# Altium PCB Full_Bridge_Converter.PcbDoc (part 3 of 3)
Units mm, origin at the board's own origin, x right, y up, seen from the top; angles counter-clockwise.
Board outline 225.68 x 119 mm, 4 copper layers (Top Layer, GND, PWD, Bottom Layer), stack 2.398 mm thick; 171 components, 54 nets, 388 pads, 114 vias.
Unrouted connection lines stored in the file: 10.
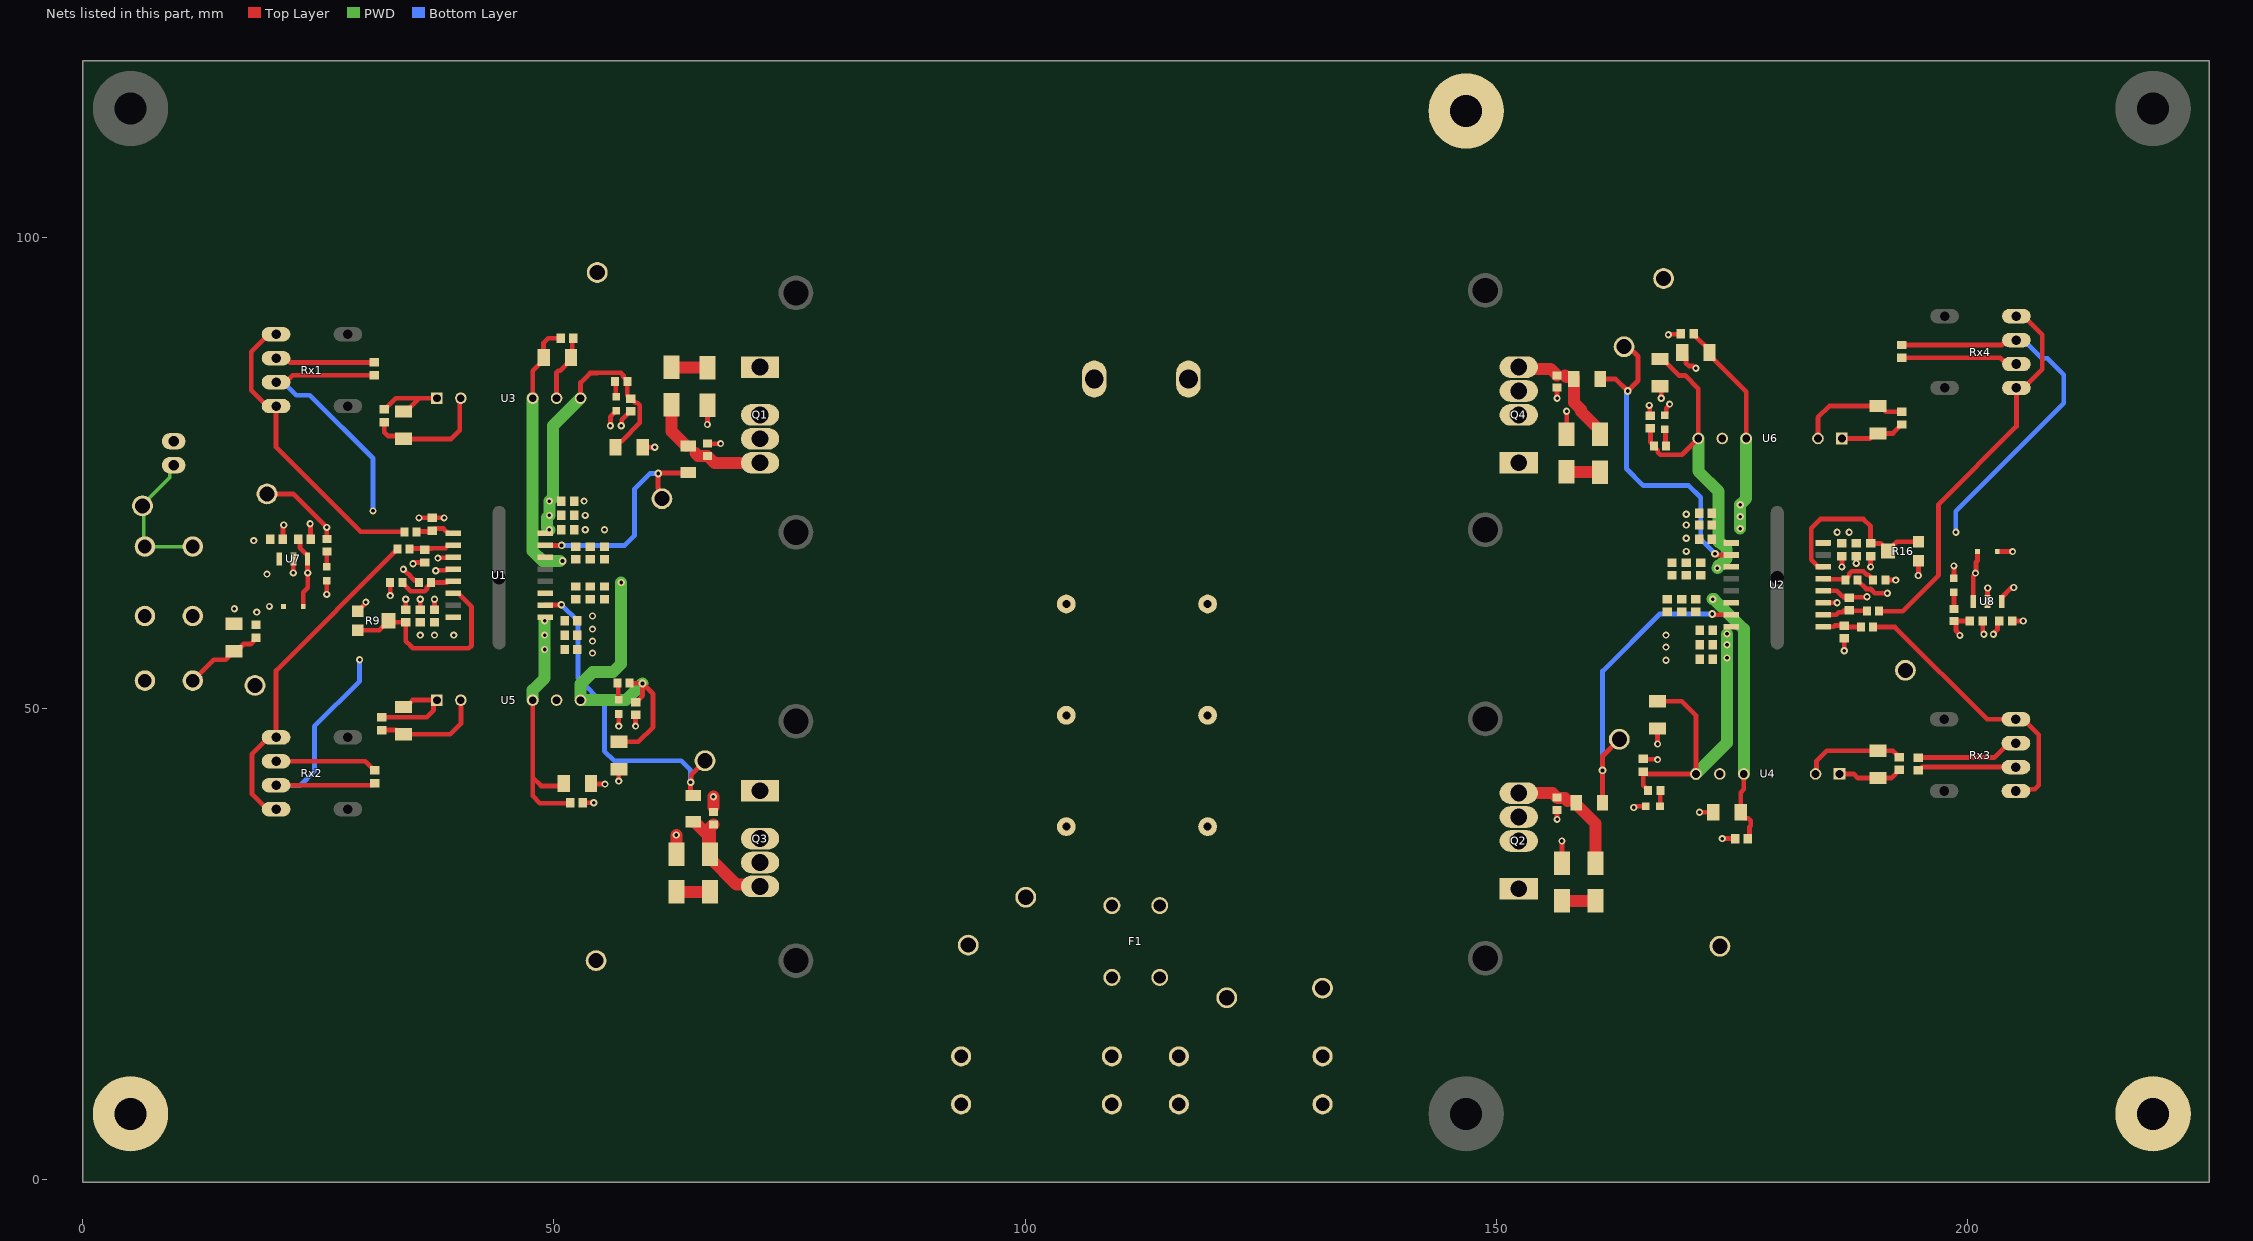
[diagram p4: the nets of this part, all layers, seen from the top]

## Part data (continued)
R19 R20 R21 R22 R23 R24: library part RC0603FR-0710KL, "RES SMD 10K OHM 1% 1/10W 0603", Device Package="0603 (1608 Metric)", Manufacturer=Yageo, Operating Temperature="-55°C ~ 155°C", Power (Watts)="0.1W, 1/10W", Supplier Device Package=0603, Supplier Part Number 1=311-10.0KHRCT-ND, Temperature Coefficient=±100ppm/°C, Tolerance=±1%, ComponentLink1Description=Datasheet, ComponentLink1URL=https://www.yageo.com/upload/media/product/productsearch/datasheet/rchip/PYu-RC_Group_51_RoHS_L_10.pdf, ComponentLink2Description="DigiKey Link", ComponentLink2URL=http://digikey.com/product-detail/en/yageo/RC0603FR-0710KL/311-10.0KHRCT-ND/729827, Composition="Thick Film", Features="Moisture Resistant", Height - Seated (Max)="0.022\" (0.55mm)", LastUpdated="2/9/2020 01:09:45", Lifecycle Status=Active, Minimum Order=1, Number of Terminations=2, Package / Case="0603 (1608 Metric)", Packaging=CutTape, Part Number=RC0603FR-0710KL, Part Status=Active, PartId=22599, Price=0.10, Resistance="10 kOhms", Series=RC, Size / Dimension="0.063\" L x 0.031\" W (1.60mm x 0.80mm)", Supplier 1=DigiKey
Rx1 Rx2 Rx3 Rx4: "RX Optical Fiber 5MBd 6-Pin", Manufacturer="Broadcom Avago", Max Operating Temperature=85°C, Max Output Current=25mA, Max Power Dissipation=40mW, Max Supply Voltage=7V, Min Operating Temperature=-40°C, Min Supply Voltage=-500mV, Operating Supply Current=10mA, Operating Supply Voltage=5V, Package Quantity=200, Supplier Part Number 1=516-2067-ND, Category="Fiber Optics", Data Rate=115Kbps, Fall Time=40ns, Height=18.8mm, Lead Free="Lead Free", Length=18.3mm, Manufacturer Part Number=HFBR-2531Z, Mount="Through Hole", Number of Pins=6, Output Current=25mA, Packaging=Rail/Tube, Pricing 1="1=12,98000, 10=9,79400, 100=8,22730, 500=7,55568, 1000=7,39200 (USD)", Radiation Hardening=No, REACH SVHC="No SVHC", Rise Time=80ns, RoHS=Yes, RoHS Compliant=Yes, Series=HFBR-2, Stock 1=6696, Supplier 1=Digi-Key, Wavelength=660nm, Weight=0.021164oz, Width=12.2mm
TP1 TP2 TP5 TP6 TP7 TP8 TP13 TP14 TP15 TP16: "Test Point, Multipurpose, Red, TH", Color=Red, Manufacturer=Keystone, Supplier Part Number 1=36-5010-ND, ComponentLink1Description="Datasheet URL", ComponentLink1URL=http://www.keyelco.com/userAssets/file/M60-2p60.pdf, CompType="Test Point Loop", ContactFinish=Silver, LatestRevisionDate=2016-02-11, MountType=TH, PackageReference="Red Multipurpose Testpoint", PartNumber=5010, Publisher="Texas Instruments", RoHS=Y, Supplier 1=Digi-Key, Supplier 2=Mouser, Supplier Part Number 2=534-5010, SymbolVersion=2008-04-04
TP3 TP4 TP9 TP10 TP11 TP12: "Test Point, Multipurpose, Black, TH", Color=Black, Manufacturer=Keystone, Supplier Part Number 1=36-5011-ND, ComponentLink1Description="Datasheet URL", ComponentLink1URL=http://www.keyelco.com/userAssets/file/M60-2p60.pdf, CompType="Test Point Loop", ContactFinish=Silver, LatestRevisionDate=2016-02-11, MountType=TH, PackageReference="Black Multipurpose Testpoint", PartNumber=5011, Publisher="Texas Instruments", RoHS=Y, Supplier 1=Digi-Key, Supplier 2=Mouser, Supplier Part Number 2=534-5011, SymbolVersion=2008-04-04
U1 U2: library part "UCC21530QDWKRQ1 (2)", "Isolated Dual-Channel Gate Driver 6A 2-Output High Side/Low Side/Half-Bridge 14-Pin SOIC T/R", Manufacturer="Texas Instruments", Supplier Part Number 1=595-UCC21530QDWKRQ1, Category="Integrated Circuits (ICs)", Manufacturer Part Number=UCC21530QDWKRQ1, Pricing 1="1=5,17000, 10=4,64000, 50=4,39000, 100=3,61000, 1000=2,59000, 10000=2,50000 (USD)", RoHS=Yes, RoHS Compliant=Yes, Stock 1=1426, Supplier 1=Mouser
U3 U4 U5 U6: "2W DC/DC-Converter 'ECONOLINE' SIP7 6.4kV unreg; V. In: 15; V. Out: +15/-03; mA. Out: +93/-185", Manufacturer=Recom, Max Output Voltage=15V, Supplier Part Number 1=945-3070-5-ND, Category="Voltage Regulators - Switching", ComponentLink1Description=https://www.recom-power.com/pdf/Econoline/RxxP2xxyy.pdf?src-supplier=Digi-Key, ComponentLink1URL=https://www.recom-power.com/pdf/Econoline/RxxP2xxyy.pdf?src-supplier=Digi-Key, Height=12.5mm, Length=19.5mm, Manufacturer Part Number=R15P21503D, Pricing 1="1=8,47000, 5=8,31800, 10=8,25500, 25=8,12800, 50=7,87400, 100=7,26000, 250=6,98500, 500=6,85800 (USD)", RoHS=Yes, RoHS Compliant=Yes, Stock 1=1614, Supplier 1=Digi-Key, Weight=4.3g, Width=9.8mm
U7 U8: "Voltage regulator; linear, fixed; 5V; 0.1A; SOT89; SMD; 0÷125°C", Case/Package=SOT-89, Dropout Voltage=1.7V, Manufacturer=STMicroelectronics, Max Input Voltage=30V, Max Operating Temperature=125°C, Max Output Current=100mA, Min Input Voltage=7V, Min Operating Temperature=0°C, Min Output Voltage=5V, Output Voltage Accuracy=4%, Package Quantity=1, Power Supply Rejection Ratio (PSRR)=49dB, Quiescent Current=6mA, Supplier Part Number 1=497-1183-1-ND, Accuracy=4%, Category="Voltage Regulators - Linear", ComponentLink1Description=https://datasheet.ciiva.com/2041/cd00000446-2041792.pdf?src-supplier=Digi-Key, ComponentLink1URL=https://datasheet.ciiva.com/2041/cd00000446-2041792.pdf?src-supplier=Digi-Key, ComponentLink2Description=https://datasheet.ciiva.com/1511/1868798-1511940.pdf?src-supplier=Element14, ComponentLink2URL=https://datasheet.ciiva.com/1511/1868798-1511940.pdf?src-supplier=Element14, ComponentLink3Description=https://datasheet.ciiva.com/7992/1868798-7992600.pdf?src-supplier=Element14, ComponentLink3URL=https://datasheet.ciiva.com/7992/1868798-7992600.pdf?src-supplier=Element14, ComponentLink4Description=https://datasheet.ciiva.com/16393/cd00000446-16393708.pdf?src-supplier=Future+Electronics, ComponentLink4URL=https://datasheet.ciiva.com/16393/cd00000446-16393708.pdf?src-supplier=Future+Electronics, ComponentLink5Description=https://datasheet.ciiva.com/22710/1868798-22710940.pdf?src-supplier=Element14, ComponentLink5URL=https://datasheet.ciiva.com/22710/1868798-22710940.pdf?src-supplier=Element14, ComponentLink6Description=https://datasheet.ciiva.com/4882/cd00000446-355303-4882429.pdf?src-supplier=Mouser, ComponentLink6URL=https://datasheet.ciiva.com/4882/cd00000446-355303-4882429.pdf?src-supplier=Mouser, ComponentLink7Description=https://datasheet.ciiva.com/2041/cd00000446-2041790.pdf?src-supplier=Digi-Key, ComponentLink7URL=https://datasheet.ciiva.com/2041/cd00000446-2041790.pdf?src-supplier=Digi-Key, ComponentLink8Description=https://datasheet.ciiva.com/2041/cd00000446-2041791.pdf?src-supplier=Digi-Key, ComponentLink8URL=https://datasheet.ciiva.com/2041/cd00000446-2041791.pdf?src-supplier=Digi-Key, Contact Plating=Tin,Matte, Height=1.6mm, Lead Free="Lead Free", Length=4.6mm, Manufacturer Part Number=L78L05ACUTR, Mount="Surface Mount", Nominal Output Voltage=5V, Number of Outputs=1, Number of Pins=3, Number of Regulators=1, Output Current=100mA, Output Type=Fixed, Output Voltage=5V, Packaging="Tape and Reel", Polarity=Positive, Pricing 1="1=0,53000, 10=0,43300, 25=0,39600, 100=0,26710, 250=0,22108, 500=0,20266, 1000=0,17380 (USD)", Radiation Hardening=No, REACH SVHC="No SVHC", RoHS=Yes, RoHS Compliant=Yes, Series=-, Stock 1=40018, Supplier 1=Digi-Key, Weight=0.004603oz, Width=2.6mm

## Free pads (board coordinates)
  oval 1.397x15.24 hole 1.397 slot 15.24 at 90 deg unplated mask+0.127: 0(44.196,63.881) 0(179.832,63.881)
  round 8 hole 3.4: 1(5.08,6.985) 1(5.08,113.665) 1(146.812,6.985) 1(146.812,113.411) 1(219.71,6.985) 1(219.71,113.665)

## Via types
v1: diameter 0.762, hole 0.381, Top Layer to Bottom Layer, 104 vias
v2: diameter 0.813, hole 0.406, Top Layer to Bottom Layer, 10 vias

## Nets (pads, with @x,y where several pads share a name; then routed paths per layer and width w, separated by ;. In a path a pad name is that pad's centre, name@x,y a point inside that pad or via, vN(x,y) a via of type N, cw(c..) or ccw(c..) an arc to the next point about the centre after c; other vN are vias at no path point)
+5V_U1: C20.2 C21.2 C64.2 C69.2 C70.2 D13.2 R10.2 R23.1 Rx1.3 Rx2.3 TP13.1 U1.3 U1.8 U7.1 | length 79.7
  Top Layer w0.508: TP13.1@19.558,72.771 22.352,72.771 v1(25.908,69.215) R23.1@25.908,67.975 ; Rx2.3@20.523,41.859 30.713,41.859 30.938,42.084 C70.2@30.988,42.084 ; Rx1.3@20.523,84.633 21.56,84.633 22.297,85.369 C69.2@30.937,85.369 ; C64.2@22.86,67.945 23.056,67.749 23.056,67.075 23.852,66.279 U7.1@23.852,65.864 23.864,65.852 23.864,64.401 v1(23.876,64.389) 23.876,62.814 23.402,62.34 D13.2@23.402,60.833 ; v1(34.036,64.77) 34.504,64.302 34.537,64.302 34.803,64.036 34.803,64.003 35.212,63.594 35.501,63.594 35.672,63.423 R10.2@35.672,63.373 ; v1(37.694,65.964) 37.732,66.002 39.283,66.002 U1.3@39.321,66.04
  Bottom Layer w0.508: Rx2.3@20.523,41.859 23.114,41.859 24.587,43.332 24.587,48.108 29.388,52.908 v1(29.388,55.169) ; Rx1.3@20.523,84.633 21.285,84.633 22.682,83.236 24.105,83.236 30.81,76.53 v1(30.81,70.968)
  other v1: 35.814,57.785 37.338,57.785 39.37,57.785
+5V_U2: C37.2 C38.2 C66.2 C71.2 C72.2 D14.2 R17.2 R24.1 Rx3.3 Rx4.3 TP14.1 U2.3 U2.8 U8.1 | length 65.2
  Top Layer w0.508: U2.3@184.707,61.214 v1(186.182,61.214) ; R17.2@188.356,63.627 188.356,63.577 189.249,62.684 189.723,62.684 190.177,62.23 v1(191.516,62.23) ; C72.2@193.04,88.574 203.647,88.574 204.17,89.097 Rx4.3@205.207,89.097 ; C71.2@194.793,44.784 202.855,44.784 204.394,46.323 Rx3.3@205.156,46.323 ; R24.1@198.577,59.284 R24.1@198.627,59.284 ; v1(199.212,57.76) 199.212,57.828 198.798,58.242 198.798,59.113 R24.1@198.627,59.284 ; C66.2@200.275,59.284 R24.1@198.627,59.284 ; U8.1@200.633,61.365 v1@200.633,64.065 ; v1(200.863,64.364) 200.912,64.412 200.912,65.497 201.083,65.668 D14.2@201.083,66.65
  Bottom Layer w0.508: v1(198.78,68.707) 198.78,70.942 210.236,82.398 210.236,85.42 208.495,87.161 207.904,87.161 205.969,89.097 Rx4.3@205.207,89.097
  other v1: 186.182,68.707 187.452,68.707
+12V: C43.2 C44.2 C45.2 C46.2 C55.2 C56.2 C57.2 C58.2 C63.2 C65.2 C67.2 C68.2 D13.1 D14.1 J6.1 TP16.1 U3.1 U4.1 U5.1 U6.1 U7.3 U8.3 | length 38.8
  Top Layer w0.508: C56.2@31.75,49.062 36.057,49.062 36.073,49.078 36.494,49.078 37.231,49.815 37.231,50.526 U5.1@37.592,50.887 35.008,50.887 34.286,50.165 C55.2@34.036,50.165 C55.2@33.64,49.769 ; C44.2@32.118,81.627 C44.2@32.004,81.741 32.054,81.741 33.244,82.931 35.704,82.931 ; C43.2@34.036,81.513 34.286,81.513 35.704,82.931 ; U3.1@37.592,82.931 35.704,82.931 ; U4.1@186.436,43.053 187.928,43.053 188.362,42.619 C45.2@190.5,42.619 191.924,42.619 192.54,43.235 192.54,43.285 192.736,43.481 C46.2@192.786,43.481 ; U6.1@186.69,78.653 189.708,78.653 190.25,79.195 C57.2@190.5,79.195 192.098,79.195 192.794,79.891 192.794,79.941 192.99,80.137 C58.2@193.04,80.137 ; D14.1@203.183,66.65 v1(204.8,66.65) ; U8.3@203.633,61.365 203.633,61.78 204.645,62.791 204.879,62.791 v1(204.927,62.84) ; C65.2@204.753,59.284 v1(205.943,59.284)
  other v1: 18.466,60.223 16.104,60.579 19.812,60.833 19.558,64.262 18.161,67.818
+15V_A: C6.2 C7.2 C8.2 C39.2 C40.2 R19.1 U1.16 U3.7 | length 32
  Top Layer w0.508: U3.7@52.832,82.931 52.832,84.582 53.848,85.598 54.61,85.598 54.65,85.638 57.113,85.638 57.379,85.372 57.379,85.18 57.8,84.759 R19.1@57.8,84.709 57.8,83.201 58.116,82.885 C39.2@58.166,82.885 58.216,82.885 58.662,82.439 58.854,82.439 59.12,82.173 59.12,80.308 57.182,78.37 56.932,78.37 56.536,77.974 C40.2@56.536,77.724
  PWD w1.27: v1(49.53,68.961) 49.294,69.197 49.294,70.249 v1(49.53,70.485) v1(49.53,72.009) 49.911,72.39 49.911,80.01 U3.7@52.832,82.931
+15V_B: C14.2 C15.2 C16.2 C51.2 C52.2 R21.1 U1.11 U5.7 | length 35.9
  Top Layer w0.508: C52.2@56.896,46.461 58.958,46.461 60.528,48.031 60.528,51.537 v2(59.411,52.654) ; R21.1@58.054,52.655 58.079,52.68 59.385,52.68 v2(59.411,52.654) ; C51.2@58.674,50.673 58.724,50.673 59.411,51.36 v2(59.411,52.654)
  PWD w1.27: v1(57.15,63.373) 57.15,54.737 56.26,53.847 54.101,53.847 52.832,52.578 U5.7@52.832,50.887 57.643,50.887 v2(59.411,52.654)
+15V_C: C23.2 C24.2 C25.2 C41.2 C42.2 R20.1 U2.16 U4.7 | length 35.1
  Top Layer w0.508: R20.1@166.116,41.275 166.116,41.325 165.608,41.833 C41.2@165.608,43.307 165.658,43.307 165.912,43.053 U4.7@171.196,43.053 171.196,49.276 169.693,50.779 C42.2@167.132,50.779
  PWD w1.27: U4.7@171.196,43.053 174.498,46.355 v1(174.498,55.372) v1(174.498,56.769) v1(174.498,57.912)
+15V_D: C31.2 C32.2 C33.2 C53.2 C54.2 R22.1 U2.11 U6.7 | length 34.2
  Top Layer w0.508: C53.2@166.37,79.716 166.37,78.267 166.736,77.901 R22.1@166.736,77.851 166.736,77.801 167.157,77.38 167.157,77.188 167.423,76.922 169.719,76.922 U6.7@171.45,78.653 171.45,83.947 170.053,85.344 169.393,85.344 167.636,87.101 C54.2@167.386,87.101
  PWD w1.27: U6.7@171.45,78.653 171.45,75.184 173.609,73.025 173.609,67.662 173.742,67.662 174.469,66.935 174.469,65.907 173.742,65.18 173.609,65.18 173.609,65.024 v1(173.482,64.897)
-3V_A: C9.1 C10.1 C11.1 C47.1 C48.1 U1.14 U3.5 | length 27.9
  Top Layer w0.508: U3.5@47.752,82.931 47.752,85.835 48.916,86.999 C48.1@48.916,87.249 48.916,88.794 49.403,89.281 C47.1@50.72,89.281
  PWD w1.27: U3.5@47.752,82.931 47.752,66.701 48.794,65.659 50.038,65.659 v2@50.673,65.659
  other v2: 50.927,65.659
-3V_B: C17.1 C18.1 C19.1 C59.1 C60.1 U1.9 U5.5 | length 27.7
  Top Layer w0.508: U5.5@47.752,50.887 47.752,42.672 ; C60.1@51.054,41.787 C60.1@51.054,42.037 50.8,41.783 48.641,41.783 47.752,42.672 ; C59.1@51.574,40.167 C59.1@51.736,40.005 51.685,39.954 48.514,39.954 47.752,40.716 47.752,42.672
  PWD w1.27: U5.5@47.752,50.887 47.752,51.943 49.022,53.213 v1(49.022,57.785) v1(49.022,59.309)
  other v1: 49.022,56.261
-3V_C: C26.1 C27.1 C28.1 C49.1 C50.1 U2.14 U4.5 | length 27.8
  Top Layer w0.508: U4.5@176.276,43.053 176.276,41.41 175.948,41.082 C50.1@175.948,38.989 175.948,38.75 176.344,38.354 176.74,38.354 177.021,38.074 177.021,37.566 176.893,37.438 176.893,36.391 C49.1@176.697,36.195
  PWD w1.27: v1(172.974,61.595) 173.101,61.595 176.276,58.42 U4.5@176.276,43.053
-3V_D: C34.1 C35.1 C36.1 C61.1 C62.1 U2.9 U6.5 | length 23.3
  Top Layer w0.508: C61.1@170.942,89.789 171.138,89.593 171.138,89.515 172.646,88.007 C62.1@172.646,87.757 172.646,87.507 176.53,83.623 U6.5@176.53,78.653
  PWD w1.27: v1(175.895,69.088) v1(175.895,71.628) 176.53,72.263 U6.5@176.53,78.653
  other v1: 175.895,70.358
GND: C5.1 C12.1 C13.1 C20.1 C21.1 C22.1 C29.1 C30.1 C37.1 C38.1 C43.1 C44.1 C45.1 C46.1 C55.1 C56.1 C57.1 C58.1 C63.1 C64.1 C65.1 C66.1 C67.1 C68.1 D15.2 D16.2 J7.2 J8.1 pad.1@5.08,6.985 pad.1@146.812,113.411 pad.1@219.71,6.985 R9.1 R11.1 R16.1 R18.1 U1.4 U2.4 U3.2 U4.2 U5.2 U6.2 U7.2 U8.2 | length 92
  Top Layer w0.508: J8.1@11.684,52.959 13.902,55.177 15.161,55.177 C67.1@16.066,56.081 16.315,56.081 17.066,56.832 17.846,56.832 18.144,57.129 18.144,57.32 18.354,57.531 C68.1@18.556,57.531 ; C63.1@21.249,67.945 21.249,69.313 21.336,69.4 v1(21.336,69.469) ; v1(22.352,64.389) U7.2@22.352,65.864 ; v1(24.13,69.596) 24.17,69.556 24.17,67.985 C64.1@24.21,67.945 ; v1(25.908,62.103) D15.2@25.908,63.539 ; R9.1@29.188,60.309 30.002,61.123 30.002,61.247 v1(30.05,61.295) ; C56.1@31.75,47.712 33.339,47.712 33.786,47.265 C55.1@34.036,47.265 39.01,47.265 40.132,48.387 U5.2@40.132,50.887 ; C44.1@32.004,80.391 32.004,79.292 32.374,78.922 33.727,78.922 C43.1@34.036,78.613 39.116,78.613 40.005,79.502 40.005,82.804 U3.2@40.132,82.931 ; R11.1@32.624,63.373 32.631,63.365 32.631,61.984 v1(32.639,61.976) ; C13.1@34.29,60.492 v1(34.29,61.595) ; v1(35.052,65.365) 35.121,65.365 35.248,65.492 C12.1@36.322,65.492 ; v1(35.687,70.231) C5.1@37.084,70.231 v1(38.354,70.231) ; C20.1@35.814,60.492 v1(35.814,61.595) ; C21.1@37.338,60.492 v1(37.338,61.595) ; v1(37.465,64.618) 37.514,64.666 38.598,64.666 38.656,64.724 38.75,64.724 38.796,64.77 U1.4@39.321,64.77 ; U4.2@183.896,43.053 184.003,43.16 184.003,44.43 185.092,45.519 C45.1@190.5,45.519 192.098,45.519 192.54,45.077 192.54,45.027 192.736,44.831 C46.1@192.786,44.831 ; U6.2@184.15,78.653 184.15,80.899 185.346,82.095 C57.1@190.5,82.095 190.75,82.095 191.358,81.487 C58.1@193.04,81.487 ; U2.4@184.707,62.484 186.132,62.484 186.658,61.958 186.748,61.958 186.944,61.762 ; v1(186.69,65.024) C38.1@186.69,66.167 ; v1(186.944,56.134) C22.1@186.944,57.451 ; C29.1@187.452,61.762 187.496,61.805 189.313,61.805 v1(189.357,61.849) ; v1(188.214,65.391) C37.1@188.214,66.167 ; v1(189.738,65.024) C30.1@189.738,66.167 ; R18.1@191.292,63.627 v1(192.405,63.627) ; v1(194.793,64.11) 194.805,64.122 194.805,65.678 R16.1@194.818,65.691 ; D16.2@198.577,63.832 v1(198.577,65.126) ; C66.1@201.625,59.284 201.625,58.082 201.752,57.955 v1(201.752,57.887) ; U8.2@202.133,61.365 202.146,61.377 202.146,62.776 v1(202.159,62.789) ; v1(202.768,57.887) 202.768,57.955 203.207,58.394 203.207,59.088 C65.1@203.403,59.284
HS_A_GND: C6.1 C7.1 C8.1 C9.2 C10.2 C11.2 C39.1 C40.1 C47.2 C48.2 D3.2 D9.2 Q1.3 R1.1 TP3.1 U3.6 | length 15.7
  Top Layer w0.508: U3.6@50.292,82.931 50.292,85.681 50.463,85.852 50.669,85.852 51.816,86.999 C48.2@51.816,87.249 51.943,87.376 51.943,89.154 C47.2@52.07,89.281 ; v1(56.007,80.01) 56.007,80.949 D9.2@56.642,81.584 ; v1(57.15,80.01) 57.199,80.059 57.199,80.618 58.116,81.535 C39.1@58.166,81.535 ; C40.1@59.436,77.724 v1(60.706,77.724) ; R1.1@66.294,78.105 v1(67.691,78.105) ; v1(66.294,80.137) D3.2@66.294,82.169
  other v1: 53.34,68.961 55.372,68.961 53.34,70.485 53.213,72.009
HS_B_GND: C23.1 C24.1 C25.1 C26.2 C27.2 C28.2 C41.1 C42.1 C49.2 C50.2 D4.2 D10.2 Q2.3 R2.1 TP4.1 U4.6 | length 10.7
  Top Layer w0.508: v1(156.464,38.227) R2.1@156.464,39.243 ; D4.2@156.972,33.591 v1(156.972,35.941) ; v1(164.592,39.497) 164.661,39.497 164.788,39.624 D10.2@165.886,39.624 ; C41.1@165.608,44.657 165.648,44.617 167.092,44.617 v1(167.132,44.577) ; v1(167.132,46.228) C42.1@167.132,47.879 ; v1(171.577,38.989) C50.2@173.048,38.989 ; v1(173.99,36.195) C49.2@175.347,36.195
  other v1: 168.021,55.118 168.021,56.515 168.021,57.785
NetC1_1: C1.1 C2.1 C3.1 C4.1 F1.3 F1.4 Q1.1 Q2.1 TP7.1
NetC5_2: C5.2 R5.2 U1.1 | length 4.1
  Top Layer w0.508: R5.2@35.565,68.709 35.565,68.74 35.619,68.794 36.997,68.794 C5.2@37.084,68.881 37.28,69.077 37.708,69.077 37.719,69.088 38.288,69.088 38.796,68.58 U1.1@39.321,68.58
NetC12_2: C12.2 R6.2 U1.2 | length 4.8
  Top Layer w0.508: R6.2@34.686,66.929 34.726,66.969 37.044,66.969 37.084,67.009 38.495,67.009 38.796,67.31 U1.2@39.321,67.31
NetC13_2: C13.2 R9.2 R9.3 U1.6 | length 21.7
  Top Layer w0.508: R9.3@29.188,58.309 31.488,58.309 32.438,59.259 R9.2@32.438,59.309 32.605,59.142 C13.2@34.29,59.142 34.29,57.15 34.799,56.641 35.052,56.388 40.977,56.388 41.275,56.686 41.275,60.801 39.846,62.23 U1.6@39.321,62.23
NetC22_2: C22.2 R12.2 U2.1 | length 4.1
  Top Layer w0.508: U2.1@184.707,58.674 185.801,58.674 185.928,58.801 C22.2@186.944,58.801 187.086,58.659 187.588,58.659 187.612,58.634 R12.2@188.692,58.634
NetC29_2: C29.2 R13.2 U2.2 | length 4.9
  Top Layer w0.508: U2.2@184.707,59.944 186.064,59.944 186.336,60.216 186.748,60.216 186.944,60.412 186.988,60.369 189.299,60.369 R13.2@189.342,60.325
NetC30_2: C30.2 R16.2 R16.3 U2.6 | length 19.6
  Top Layer w0.508: U2.6@184.707,65.024 184.182,65.024 183.428,65.778 183.428,69.128 184.404,70.104 188.976,70.104 189.738,69.342 C30.2@189.738,67.517 190.792,67.517 R16.2@191.568,66.741 ; R16.2@191.568,66.691 R16.2@191.568,66.741 ; R16.3@194.818,67.691 192.518,67.691 R16.2@191.568,66.741
NetC69_1: C69.1 Rx1.2 | length 10.6
  Top Layer w0.508: Rx1.2@20.523,87.173 21.56,87.173 22.014,86.719 C69.1@30.937,86.719
NetC70_1: C70.1 Rx2.2 | length 10.9
  Top Layer w0.508: Rx2.2@20.523,44.399 29.973,44.399 30.938,43.434 C70.1@30.988,43.434
NetC71_1: C71.1 Rx3.2 | length 10.5
  Top Layer w0.508: C71.1@194.793,43.434 194.843,43.434 195.192,43.783 Rx3.2@205.156,43.783
NetC72_1: C72.1 Rx4.2 | length 12.4
  Top Layer w0.508: C72.1@193.04,87.224 203.503,87.224 204.17,86.557 Rx4.2@205.207,86.557
NetD1_1: D1.1 D3.1 | length 3.8
  Top Layer w1.27: D1.1@62.484,86.233 62.516,86.201 66.262,86.201 D3.1@66.294,86.169
NetD1_2: D1.2 Q1.4 R1.2 R7.2 | length 13.7
  Top Layer w0.508: R7.2@64.037,77.851 R7.2@64.262,77.851 64.487,77.851 65.01,77.328 65.01,77.103
  Top Layer w1.27: D1.2@62.484,82.233 62.484,79.404 R7.2@64.037,77.851 ; 65.01,77.103 65.308,76.805 R1.2@66.294,76.805 67.026,76.073 Q1.4@71.882,76.073
NetD2_1: D2.1 D4.1 | length 3.6
  Top Layer w1.27: D4.1@156.972,29.591 D2.1@160.528,29.591
NetD2_2: D2.2 Q2.4 R2.2 R14.2 | length 12.8
  Top Layer w1.27: Q2.4@152.4,41.021 155.986,41.021 R2.2@156.464,40.543 156.504,40.503 157.285,40.503 157.593,40.195 ; R14.2@158.49,40.005 158.49,39.85 160.528,37.812 D2.2@160.528,33.591
NetD5_1: D5.1 D7.1 | length 3.6
  Top Layer w1.27: D7.1@62.992,30.544 D5.1@66.548,30.544
NetD5_2: D5.2 Q3.4 R3.2 R8.2 | length 14.6
  Top Layer w1.27: R8.2@64.77,37.973 64.925,37.973 66.333,36.565 66.333,34.759 D5.2@66.548,34.544 ; R3.2@66.929,37.704 66.548,37.323 D5.2@66.548,34.544 ; Q3.4@71.882,31.115 71.687,31.31 69.382,31.31 66.548,34.144 D5.2@66.548,34.544
NetD6_1: D6.1 D8.1 | length 3.6
  Top Layer w1.27: D8.1@157.48,75.121 157.496,75.105 161.02,75.105 D6.1@161.036,75.089
NetD6_2: D6.2 Q4.4 R4.2 R15.2 | length 12.7
  Top Layer w1.27: Q4.4@152.4,86.233 152.595,86.038 155.785,86.038 R4.2@156.464,85.359 ; 157.285,85.319 157.451,85.153 158.207,85.153 158.242,85.118 R15.2@158.242,84.963 158.242,82.492 158.991,81.743 158.991,81.534 161.036,79.489 D6.2@161.036,79.089
NetD9_1: D9.1 R19.2 | length 1.7
  Top Layer w0.508: R19.2@56.5,84.709 56.571,84.638 56.571,83.155 D9.1@56.642,83.084
NetD10_1: D10.1 R20.2 | length 1.7
  Top Layer w0.508: D10.1@167.386,39.624 167.401,39.639 167.401,41.26 R20.2@167.416,41.275
NetD11_1: D11.1 R21.2 | length 1.8
  Top Layer w0.508: R21.2@56.754,52.705 56.825,52.634 56.825,50.986 D11.1@56.896,50.915
NetD12_1: D12.1 R22.2 | length 1.8
  Top Layer w0.508: D12.1@167.894,79.629 167.965,79.558 167.965,77.922 R22.2@168.036,77.851
NetD15_1: D15.1 R23.2 | length 1.6
  Top Layer w0.508: D15.1@25.908,65.039 R23.2@25.908,66.675
NetD16_1: D16.1 R24.2 | length 1.7
  Top Layer w0.508: R24.2@198.577,60.584 D16.1@198.577,62.332
NetF1_1: F1.1 F1.2 J1.1
NetJ2_1: J2.1 Q1.2 Q3.1 TP8.1
NetJ3_1: J3.1 Q2.2 Q4.1 TP11.1
NetJ5_1: J5.1 J7.1 TP15.1 | length 15.4
  PWD w0.381: J7.1@9.652,75.819 9.221,75.388 9.221,74.499 6.35,71.628 TP15.1@6.35,71.501 6.477,71.374 6.477,67.31 J5.1@6.604,67.183 10.855,67.183 11.43,67.758 J5.1@11.43,67.945
NetR5_1: R5.1 Rx1.1 Rx1.4 | length 32.6
  Top Layer w0.508: Rx1.1@20.523,89.713 19.761,89.713 17.882,87.833 17.882,83.787 19.576,82.093 Rx1.4@20.523,82.093 20.523,77.724 29.489,68.758 34.047,68.758 34.148,68.657 R5.1@34.148,68.707
NetR6_1: R6.1 Rx2.1 Rx2.4 | length 36.1
  Top Layer w0.508: Rx2.4@20.523,39.319 19.576,39.319 17.958,40.938 17.958,45.136 19.761,46.939 Rx2.1@20.523,46.939 20.523,54.016 33.386,66.879 R6.1@33.386,66.929
NetR7_1: R7.1 TP1.1 U1.15 | length 24.1
  Top Layer w0.508: U1.15@49.071,67.31 v2(50.825,67.31) ; TP1.1@61.062,72.239 61.142,72.32 61.142,73.331 61.062,73.411 61.062,74.905 61.145,74.988 64.199,74.988 R7.1@64.262,75.051
  Bottom Layer w0.508: v2(50.825,67.31) 57.531,67.31 58.547,68.326 58.547,73.279 60.198,74.93 v2(61.087,74.93)
NetR8_1: R8.1 TP2.1 U1.10 | length 34.9
  Top Layer w0.508: U1.10@49.071,60.96 49.096,60.985 50.775,60.985 v2(50.8,61.011) ; R8.1@64.77,40.773 64.516,41.027 v2(64.516,42.164) 64.574,42.222 64.574,42.984 TP2.1@66.04,44.45
  Bottom Layer w0.508: v2(50.8,61.011) 52.578,59.233 52.578,53.213 55.372,50.419 55.372,45.466 56.388,44.45 63.5,44.45 64.516,43.434 v2(64.516,42.164)
NetR10_1: R10.1 R11.2 U1.5 | length 6.4
  Top Layer w0.508: R11.2@33.924,63.373 33.924,63.323 34.803,62.444 36.285,62.444 36.551,62.71 36.551,62.902 36.972,63.323 R10.1@36.972,63.373 38.669,63.373 38.796,63.5 U1.5@39.321,63.5
NetR12_1: R12.1 Rx3.1 Rx3.4 | length 30.3
  Top Layer w0.508: R12.1@189.992,58.634 192.318,58.634 202.089,48.863 Rx3.4@205.156,48.863 205.918,48.863 207.569,47.212 207.569,41.859 207.147,41.437 205.35,41.437 Rx3.1@205.156,41.243
NetR13_1: R13.1 Rx4.1 Rx4.4 | length 42
  Top Layer w0.508: R13.1@190.642,60.325 193.142,60.325 196.952,64.135 196.952,71.679 205.207,79.934 Rx4.1@205.207,84.017 205.969,84.017 207.95,85.998 207.95,89.655 205.969,91.637 Rx4.4@205.207,91.637
NetR14_1: R14.1 TP5.1 U2.15 | length 34.2
  Top Layer w0.508: R14.1@161.29,40.005 v2(161.29,43.434) 161.29,44.958 TP5.1@163.068,46.736 ; v2(172.922,60.019) 172.98,59.96 173.085,59.96 173.101,59.944 U2.15@174.957,59.944
  Bottom Layer w0.508: v2(161.29,43.434) 161.29,53.975 167.334,60.019 v2(172.922,60.019)
NetR15_1: R15.1 TP6.1 U2.10 | length 35.3
  Top Layer w0.508: R15.1@161.042,84.963 162.687,84.963 v2(163.957,83.693) 165.053,84.789 165.053,87.376 164.037,88.392 TP6.1@163.576,88.392 ; v2(173.228,66.421) 173.355,66.294 U2.10@174.957,66.294
  Bottom Layer w0.508: v2(163.957,83.693) 163.83,83.566 163.83,75.438 165.608,73.66 170.434,73.66 171.704,72.39 171.704,67.945 v2(173.228,66.421)
NetR17_1: R17.1 R18.2 U2.5 | length 6.3
  Top Layer w0.508: U2.5@184.707,63.754 184.753,63.708 186.975,63.708 R17.1@187.056,63.627 187.056,63.677 187.477,64.098 187.477,64.29 187.743,64.556 188.969,64.556 189.336,64.189 189.48,64.189 189.992,63.677 R18.2@189.992,63.627
PGND: C1.2 C2.2 C3.2 C4.2 C14.1 C15.1 C16.1 C17.2 C18.2 C19.2 C31.1 C32.1 C33.1 C34.2 C35.2 C36.2 C51.1 C52.1 C53.1 C54.1 C59.2 C60.2 C61.2 C62.2 D7.2 D8.2 D11.2 D12.2 J4.1 Q3.2 Q3.3 Q4.2 Q4.3 R3.1 R4.1 TP9.1 TP10.1 TP12.1 U5.6 U6.6 | length 20.9
  Top Layer w0.508: C59.2@53.086,40.005 v1(54.229,40.005) ; C60.2@53.954,42.037 54.017,41.974 v1(55.425,41.974) ; v1(56.896,42.291) C52.1@56.896,43.561 ; v1(56.896,48.133) D11.2@56.896,49.415 ; v1(58.674,48.133) C51.1@58.674,49.323 ; v1(156.464,82.931) R4.1@156.464,84.059 ; D8.2@157.48,79.121 v1(157.48,81.534) ; v1(166.243,82.169) 166.292,82.12 166.292,81.144 C53.1@166.37,81.066 ; C54.1@167.386,84.201 167.513,84.074 v1(167.513,82.931) ; D12.2@167.894,81.129 168.04,81.275 168.04,81.865 168.402,82.227 v1(168.402,82.296) ; v1(168.275,89.662) 168.324,89.711 169.514,89.711 C61.2@169.592,89.789 ; C62.2@169.746,87.757 170.142,87.361 170.142,86.658 170.44,86.36 170.873,86.36 171.127,86.106 v1(171.196,86.106)
  Top Layer w1.27: D7.2@62.992,34.544 v1(62.992,36.576) ; 66.929,39.497 v1(66.929,40.64)
  other v1: 54.102,55.88 54.102,57.15 54.102,58.42 54.102,59.817 170.18,66.675 170.18,68.072 170.18,69.469 170.18,70.612
pads on no net: H1.1 H1.2 H2.1 H2.2 H3.1 H3.2 H4.1 H4.2 H5.0 H6.0 H7.0 H8.0 H9.0 H10.0 H11.0 H12.0 H13.0 H14.0 H15.0 H16.0 Rx1.5 Rx1.8 Rx2.5 Rx2.8 Rx3.5 Rx3.8 Rx4.5 Rx4.8 U1.7 U1.12 U1.13 U2.7 U2.12 U2.13

## Polygon pours and split planes (outlines as drawn)
+12V on PWD "+12V_L03_P003" (solid, pour order 3): 24.892,46.609 25.273,46.228 37.084,46.228 39.116,48.26 39.116,100.711 43.434,105.029 183.896,105.029 185.674,103.251 185.674,38.735 187.579,36.83 195.707,36.83 197.358,38.481 197.358,51.943 202.057,56.642 211.201,56.642 214.63,60.071 214.63,85.725 208.915,91.44 201.676,91.44 197.104,96.012 197.104,105.918 193.548,109.474 37.973,109.474 30.226,101.727 30.226,73.66 26.924,70.358 26.67,70.612 19.05,70.612 17.145,68.707 17.145,62.865 16.129,61.849 5.08,61.849 2.413,59.182 2.413,49.149 4.953,46.609
+12V on PWD "+12V_L03_P005" (solid, pour order 5): 196.215,80.645 195.326,79.756 195.326,77.724 196.342,76.708 204.597,76.708 206.629,74.676 206.629,60.452 207.899,59.182 209.55,59.182 210.312,59.944 210.312,77.597 207.264,80.645
NetJ5_1 on PWD "NETJ5_1_L03_P002" (solid, pour order 2): 2.54,79.375 5.08,81.915 13.97,81.915 16.51,79.375 16.51,65.405 13.97,62.865 5.08,62.865 2.54,65.405
NetF1_1 on Top Layer "NETF1_1_L01_P035" (solid, pour order 35): 106.807,20.447 106.68,20.574 106.68,22.225 107.95,23.495 115.57,23.495 116.84,22.225 116.84,19.05 116.205,18.415 113.03,18.415 111.125,16.51 111.125,6.985 109.855,5.715 107.95,5.715 106.68,6.985 106.68,20.32
NetC1_1 on Top Layer "NETC1_1_L01_P034" (solid, pour order 34): 97.79,28.702 102.108,24.384 153.035,24.384 154.051,25.4 153.924,25.527 153.67,27.94 153.67,33.02 153.035,33.655 115.57,33.655 111.76,37.465 111.76,91.44 105.029,98.171 72.771,98.171 69.342,94.742 69.342,86.741 69.215,83.82 70.485,82.55 92.075,82.55 97.79,76.835
+5V_U2 on Top Layer "+5V_U2_L01_P033" (solid, pour order 33): 184.15,68.453 184.912,69.215 188.468,69.215 188.976,68.707 188.976,67.437 188.468,66.929 184.404,66.929 184.15,67.183
HS_B_GND on Top Layer "HS_B_GND_L01_P031" (solid, pour order 31): 167.259,60.452 167.513,60.706 171.45,60.706 171.831,60.325 171.831,54.737 171.323,54.229 171.196,54.356 167.767,54.356 167.259,54.864
+15V_C on Top Layer "+15V_C_L01_P030" (solid, pour order 30): 172.339,54.229 172.72,53.848 175.514,53.848 176.276,54.61 176.276,58.928 175.895,59.309 172.72,59.309 172.466,59.055 172.339,59.055
-3V_C on Top Layer "-3V_C_L01_P029" (solid, pour order 29): 173.228,62.357 173.736,61.849 175.387,61.849 175.641,61.595 175.641,60.833 175.387,60.579 173.228,60.579 172.847,60.96 167.513,60.96 167.259,61.214 167.259,61.849 167.64,62.23 167.64,62.357
+15V_D on Top Layer "+15V_D_L01_P028" (solid, pour order 28): 167.259,64.262 167.64,64.643 172.72,64.643 173.101,65.024 173.101,65.405 173.355,65.659 175.895,65.659 176.276,65.278 176.276,64.643 175.895,64.262 173.609,64.262 173.101,63.754 173.101,63.246 172.974,63.119 172.847,63.246 167.513,63.246 167.259,63.5
PGND on Top Layer "PGND_L01_P027" (solid, pour order 27): 171.069,72.644 170.053,72.644 169.545,72.136 169.545,66.929 169.037,66.421 167.64,66.421 167.132,65.913 167.132,65.151 167.386,64.897 171.704,64.897 171.958,65.151 171.958,71.755
-3V_D on Top Layer "-3V_D_L01_P026" (solid, pour order 26): 177.165,68.072 177.038,68.072 176.276,67.31 172.974,67.31 172.212,68.072 172.212,71.882 172.974,72.644 176.53,72.644 177.165,72.009
+15V_B on Top Layer "+15V_B_L01_P024" (solid, pour order 24): 48.006,63.373 49.022,64.389 58.293,64.389 58.801,63.881 58.801,62.611 58.42,62.23 50.927,62.23 50.292,61.595 48.26,61.595 48.006,61.849
PGND on Top Layer "PGND_L01_P023" (solid, pour order 23): 51.435,61.849 51.435,60.706 52.07,60.071 52.07,55.499 52.324,55.499 53.086,54.737 54.61,54.737 55.753,55.88 55.753,59.944 56.769,60.96 56.769,61.976 56.515,62.23 51.816,62.23
-3V_B on Top Layer "-3V_B_L01_P022" (solid, pour order 22): 48.006,59.817 48.514,60.325 51.181,60.325 51.816,59.69 51.816,55.499 51.435,55.118 48.387,55.118 48.006,55.499
PGND on Top Layer "PGND_L01_P021" (solid, pour order 21): 48.006,62.23 48.006,62.484 48.387,62.865 48.387,62.611 48.323,62.547 48.323,62.865
-3V_A on Top Layer "-3V_A_L01_P018" (solid, pour order 18): 48.133,66.167 48.514,66.548 56.388,66.548 56.896,66.04 56.896,65.151 56.515,64.77 48.641,64.77 48.133,65.278
HS_A_GND on Top Layer "HS_A_GND_L01_P017" (solid, pour order 17): 51.562,73.025 51.562,67.31 52.07,66.802 56.388,66.802 56.896,67.31 56.896,73.025 56.642,73.279 51.816,73.279
+15V_A on Top Layer "+15V_A_L01_P016" (solid, pour order 16): 47.625,73.025 47.879,73.279 50.546,73.279 50.8,73.025 50.8,68.199 50.546,67.945 48.514,67.945 48.006,68.453 48.006,68.961 47.625,69.342
+5V_U1 on Top Layer "+5V_U1_L01_P013" (solid, pour order 13): 35.052,59.309 35.306,59.563 35.306,59.817 38.1,59.817 38.354,60.071 40.132,60.071 40.386,59.817 40.386,57.531 39.878,57.023 35.56,57.023 35.56,57.277 35.052,57.785
+12V on Top Layer "+12V_L01_P004" (solid, pour order 4): 14.605,68.834 20.193,68.834 20.574,68.453 20.574,67.437 21.59,66.421 21.59,59.817 20.955,59.182 19.685,59.182 18.034,57.531 14.097,57.531 13.716,57.912 13.716,67.945
+5V_U2 on Bottom Layer "+5V_U2_L04_P032" (solid, pour order 32): 184.912,63.034 184.912,40.513 187.96,37.465 208.28,37.465 210.82,40.005 210.82,67.31 208.28,69.85 186.69,69.85 184.912,68.072
+5V_U1 on Bottom Layer "+5V_U1_L04_P012" (solid, pour order 12): 23.114,63.881 23.114,66.421 22.352,67.183 22.352,71.247 22.86,71.755 38.608,71.755 40.386,69.977 40.386,58.039 36.83,54.483 24.13,54.483 22.86,55.753
NetJ3_1 on Bottom Layer "NETJ3_1_L04_P037" (solid, pour order 37): 153.924,78.613 155.448,77.089 155.448,34.417 153.924,32.893 142.748,32.893 136.652,26.797 136.652,5.969 134.112,3.429 130.048,3.429 127,6.477 127,32.385 136.144,41.529 141.224,41.529 144.272,44.577 144.272,76.581 146.304,78.613 149.86,78.613
NetJ2_1 on Bottom Layer "NETJ2_1_L04_P036" (solid, pour order 36): 70.866,82.296 77.089,82.296 78.74,80.645 78.74,46.355 80.645,44.45 87.63,44.45 97.155,34.925 97.155,6.985 95.25,5.08 90.805,5.08 88.9,6.985 88.9,31.115 81.915,38.1 71.755,38.1 69.215,40.64 69.215,80.645
GND on GND "GND_L02_P000" (solid, pour order 0): 16.51,116.205 211.201,116.205 222.25,105.156 222.25,6.985 218.44,3.175 186.69,3.175 182.88,6.985 182.88,98.425 179.07,102.235 46.99,102.235 41.91,97.155 41.91,9.525 34.29,1.905 8.89,1.905 2.54,8.255 2.54,102.235
PGND on GND "PGND_L02_P019" (solid, pour order 19): 50.292,63.5 46.99,60.198 46.99,9.906 54.991,1.905 115.316,1.905 123.571,10.16 123.571,53.086 133.35,62.865 172.339,62.865 172.593,63.119 175.895,63.119 177.546,64.77 177.546,93.345 172.593,98.298 118.999,98.298 112.141,91.44 112.141,27.813 106.68,22.352 106.553,22.479 91.821,22.479 91.821,22.606 83.312,31.115 83.312,61.468 81.28,63.5
HS_A_GND on GND "HS_A_GND_L02_P015" (solid, pour order 15): 46.99,94.615 50.8,98.425 77.47,98.425 82.55,93.345 82.55,67.945 80.01,65.405 50.8,65.405 46.99,69.215
HS_B_GND on GND "HS_B_GND_L02_P025" (solid, pour order 25): 177.8,58.674 175.895,60.579 149.86,60.579 144.78,55.499 144.78,20.701 149.606,15.875 174.879,15.875 177.546,18.542

## Silkscreen, mask and mechanical layers (free items; w line width, h text height)
Top Overlay:
  text "Kaseng Fong Chen 2021" at 182.245,113.792 h1.52
  text "600W FULL BRIDGE CONVERTER" at 17.653,112.268 h2.54
  text "Vin= 200V  DC" at 17.907,107.95 h1.27
  text "Vo= 120Vrms, 60Hz" at 18.161,105.071 h1.27
  text "HS_A_GND" at 52.959,93.684 h0.51
  text "PGND" at 167.259,92.583 h0.51
  text "PWM-B" at 8.585,90.627 h2.03 r270
  text "LS_Gate_B" at 160.147,90.636 h0.51
  text "PWM-D" at 216.814,83.058 h2.03 r90
  text "12V" at 3.175,79.756 h2.03 r270
  text "HS_Gate_A" at 58.039,69.808 h0.51
  text "I/O" at 3.175,68.834 h1.52 r270
  text "12V" at 2.921,61.468 h1.52 r270
  text "GND" at 2.921,54.864 h1.52 r270
  text "PWM-A" at 8.407,47.625 h2.03 r270
  text "LS_Gate_A" at 62.865,46.694 h0.51
  text "HS_Gate_B" at 156.591,46.44 h0.51
  text "PWM-C" at 216.941,40.157 h2.03 r90
  text "Vin" at 98.171,32.004 h0.51
  text "Va" at 91.948,26.797 h0.51
  text "Vb" at 129.921,22.225 h0.51
  text "HS_B_GND" at 171.831,22.056 h0.51
  text "PGND" at 53.467,19.939 h0.51
  text "PGND" at 120.65,16.51 h0.51
  text "Va" at 92.329,3.048 h2.03
  text "Vi+" at 105.537,3.048 h2.03
  text "PGND" at 114.173,3.048 h2.03
  text "Vb" at 130.937,3.048 h2.03

## Text inside footprints (layer, text, board x,y; h text height)
C1: Top Overlay "+" at 107.648,82.213 h2 r180
Q1: Mechanical 13 "TAB" at 74.045,81.629 h0.64 r270
Q2: Mechanical 13 "TAB" at 150.237,35.465 h0.64 r90
Q3: Mechanical 13 "TAB" at 74.045,36.671 h0.64 r270
Q4: Mechanical 13 "TAB" at 150.237,80.677 h0.64 r90